# Altium PCB FMC-320U-B1.PcbDoc (part 2 of 2)
Units mil, origin at the board's own origin, x right, y up, seen from the top; angles counter-clockwise.
Board outline 3385.83 x 3385.83 mil, 2 copper layers (Top Layer, Bottom Layer), stack 65.8 mil thick; 83 components, 122 nets, 425 pads, 151 vias.
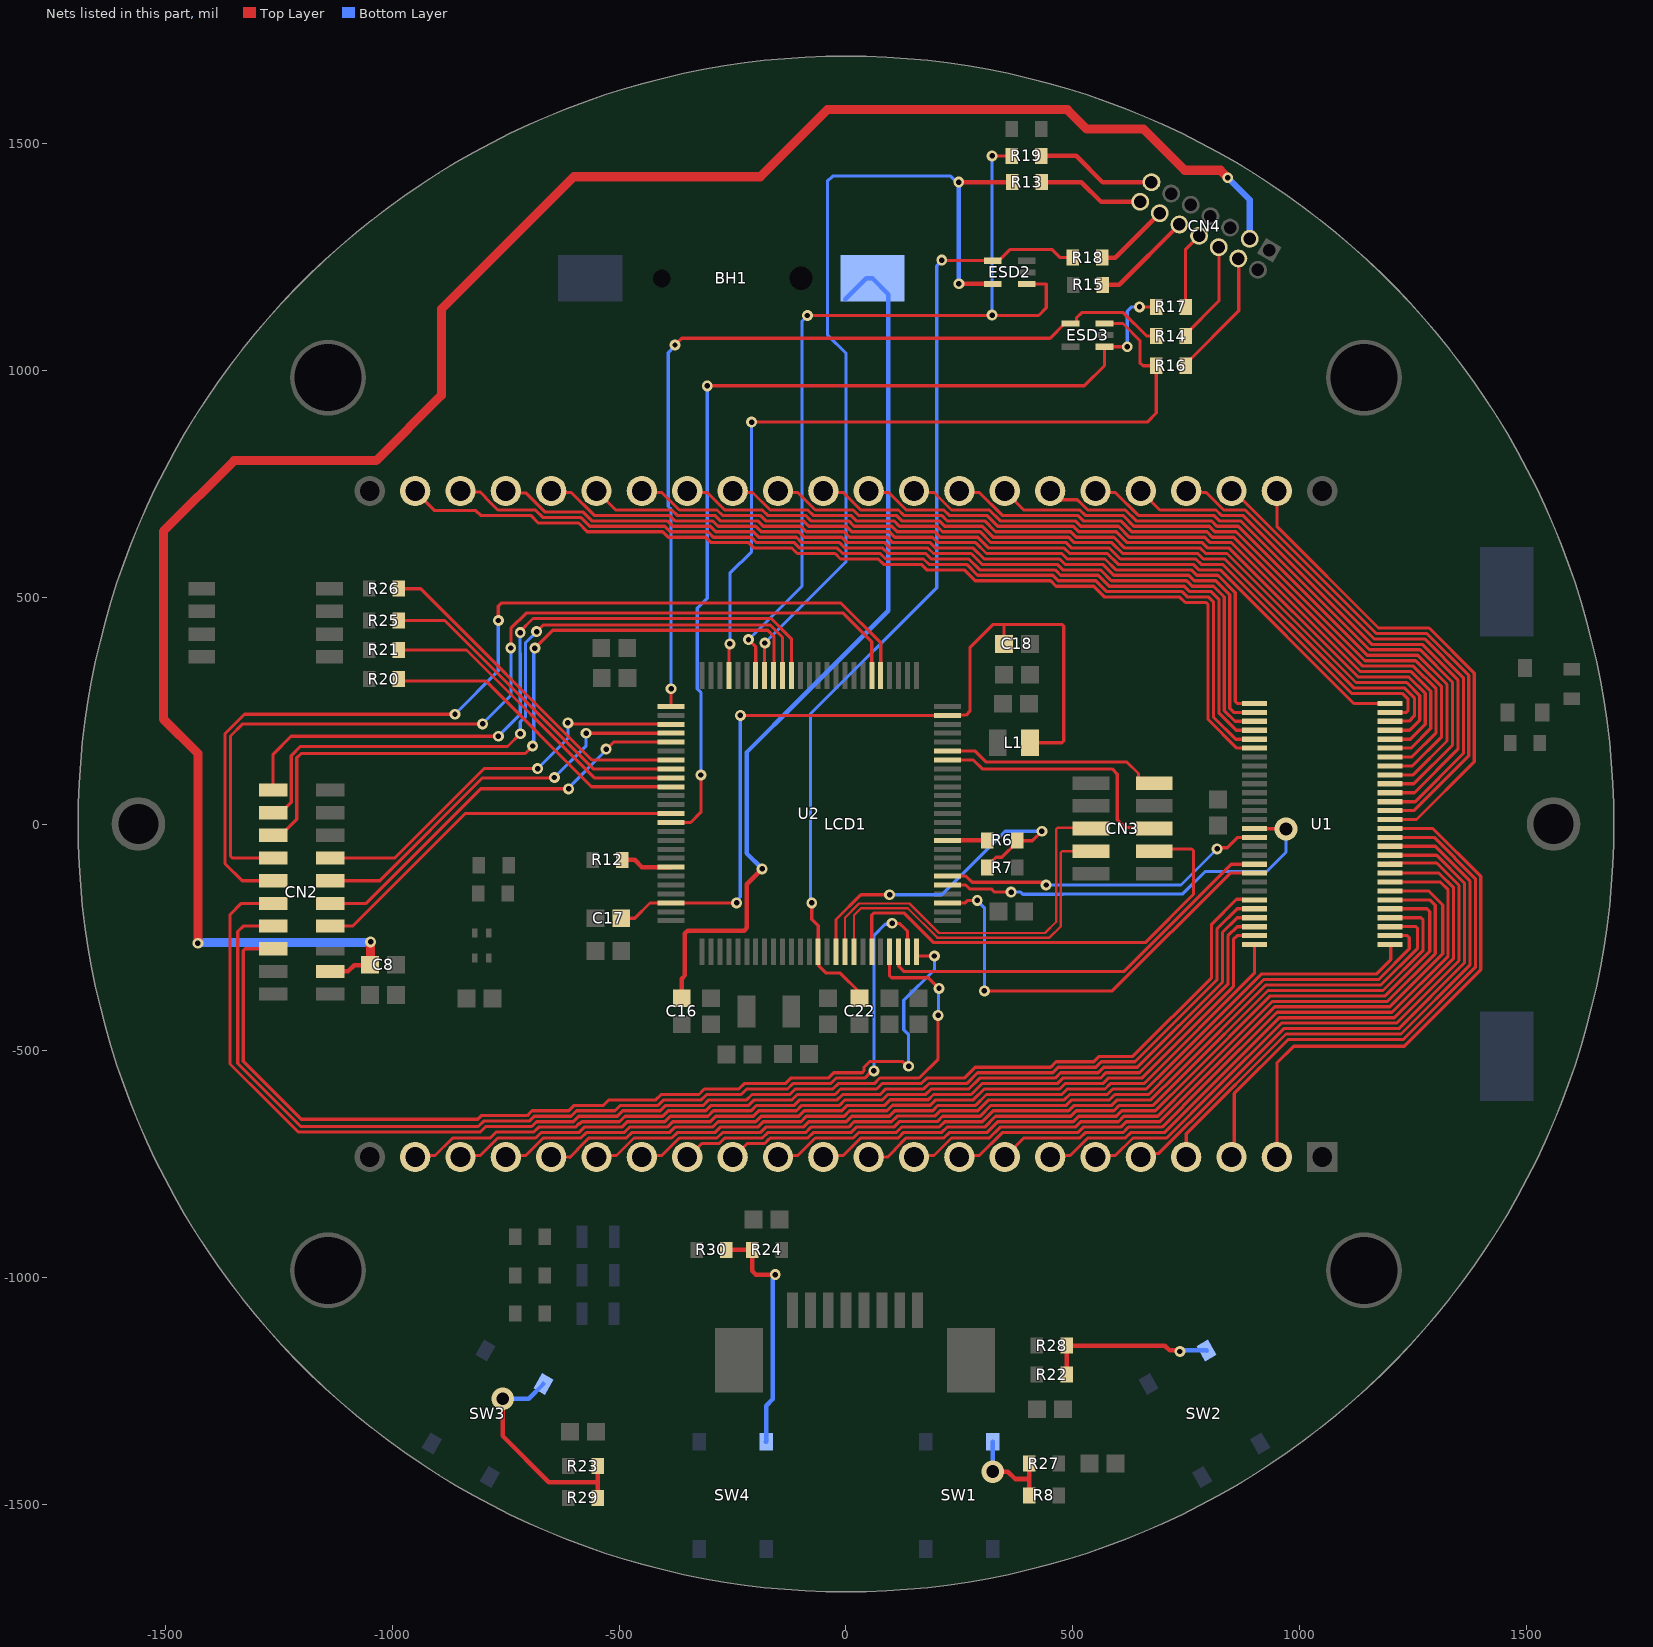
[diagram p2: the nets of this part, all layers, seen from the top]

## Via types
v1: diameter 24, hole 12, Top Layer to Bottom Layer, 140 vias
v2: diameter 50, hole 28, Top Layer to Bottom Layer, 11 vias

## Nets (pads, with @x,y where several pads share a name; then routed paths per layer and width w, separated by ;. In a path a pad name is that pad's centre, name@x,y a point inside that pad or via, vN(x,y) a via of type N, cw(c..) or ccw(c..) an arc to the next point about the centre after c; other vN are vias at no path point) (continued)
NetR6_1: R6.1 R7.2 U2.16 | length 761.9
  Top Layer w7: U2.16@-21.94,-281.65 -21.94,-210.64 32.73,-155.97 v1(96.17,-155.97) ; R7.2@311.88,-96 311.88,-92.06 330.78,-73.17 343.77,-73.17 377,-39.94 R6.1@377,-36 ; R6.1@379,-37 411,-37 v1(432,-16)
  Bottom Layer w7: v1(96.17,-155.97) 211.03,-155.97 351,-16 v1(432,-16)
NetR6_2: R6.2 U2.35 | length 89.4
  Top Layer w10: U2.35@223.65,-36.06 223.7,-36 R6.2@311.88,-36 R6.2@313,-36
NetR8_1: R8.1 R27.2 SW1.2 | length 222.6
  Top Layer w10: v2(323.82,-1427.72) 356.7,-1427.72 372.97,-1443.99 403.84,-1443.99 ; R8.1@403.84,-1480 403.84,-1478.28 403.84,-1443.99 ; R27.2@403.84,-1410 403.84,-1443.99
  Bottom Layer w10: v2(323.82,-1427.72) SW1.2@323.82,-1361.89
NetR12_2: R12.2 U2.94 | length 114.5
  Top Layer w10: R12.2@-493.44,-79 -466,-79 -449.89,-95.11 U2.94@-385.65,-95.11
NetR22_1: R22.1 R28.2 SW2.2 | length 379.2
  Top Layer w10: R22.1@486.18,-1214.06 R28.2@486.18,-1150 703,-1150 713.32,-1160.32 733.32,-1160.32 v1(736,-1163)
  Bottom Layer w10: v1(736,-1163) 738.33,-1160.67 794.74,-1160.67 SW2.2@794.87,-1160.8
NetR23_1: R23.1 R29.2 SW3.2 | length 507.3
  Top Layer w10: v2(-757,-1267) -757,-1349.14 -655.14,-1451 -547.44,-1451 ; R29.2@-547.44,-1485.71 -547.44,-1451 ; R23.1@-547.44,-1415.71 -547.44,-1451
  Bottom Layer w10: v2(-757,-1267) -699.39,-1267 SW3.2@-667.02,-1234.62
NetR24_1: R24.1 R30.2 SW4.2 | length 554.4
  Top Layer w10: R30.2@-264.44,-939 R24.1@-219.12,-939 ; v1(-155.94,-993.28) -198.84,-993.28 -207.12,-985 R24.1@-207.12,-951 ; R24.1@-219.12,-939 R24.1@-207.12,-939 R24.1@-207.12,-951 ; R24.1@-219.12,-939 -215.9,-939 -207.12,-947.78 R24.1@-207.12,-951
  Bottom Layer w10: SW4.2@-176.59,-1362.3 SW4.2@-176.18,-1361.89 -176.18,-1282.18 -162,-1268 -162,-1003.13 -155.94,-997.06 v1(-155.94,-993.28)
NetU1_15: U1.15 U2.30 | length 914.4
  Top Layer w7: U2.30@223.65,-134.48 263.67,-134.48 272.3,-143.11 320.12,-143.11 327.01,-150 v1(364,-150) ; U1.15@900.39,-9.84 900.97,-10.42 969.42,-10.42 v2(970,-11)
  Bottom Layer w7: v1(364,-150) 385.02,-150 390,-154.98 478.02,-154.98 479,-154 742.42,-154 791.42,-105 927,-105 970,-62 v2(970,-11)
NetU1_16: U1.16 U2.31 | length 728.4
  Top Layer w7: U2.31@223.65,-114.8 264.57,-114.8 278.26,-128.49 430.41,-128.49 436.4,-134.48 v1(441,-134.48) ; v1(818,-55.01) 820.55,-52.46 840.5,-52.46 863.43,-29.53 U1.16@900.39,-29.53
  Bottom Layer w7: v1(441,-134.48) 738.64,-134.48 790.34,-82.78 790.34,-82.67 v1(818,-55.01)
NetU1_19: U1.19 U2.23 | length 918.9
  Top Layer w7: U2.23@115.85,-281.65 116.36,-282.16 116.36,-313.97 127.22,-324.83 613.27,-324.83 849.52,-88.58 U1.19@900.39,-88.58
NetU1_20: U1.20 U2.28 | length 985.4
  Top Layer w7: U2.28@223.65,-173.85 263.25,-173.85 268.76,-168.34 v1(289.32,-168.34) ; v1@299.25,-362.07 v1(305.18,-368) 587.07,-368 846.8,-108.27 U1.20@900.39,-108.27
  Bottom Layer w7: v1(289.32,-168.34) 289.32,-168.43 305.18,-184.3 v1(305.18,-368)
NRST: C22.1 ESD2.4 R18.2 U2.14 | length 2104.7
  Top Layer w7: v1(-75.49,-173.85) -75.49,-209.95 -61.31,-224.12 U2.14@-61.31,-281.65 -60.8,-282.16 -60.8,-311.66 -43.83,-328.63 -12.75,-328.63 C22.1@30,-371.38 ; v1(211,1243) 211.71,1242.29 322.89,1242.29 ESD2.4@323.6,1241.59 336.39,1241.59 361.22,1266.42 454.62,1266.42 472.34,1248.7 R18.2@500.04,1248.7
  Bottom Layer w7: v1(-75.49,-173.85) -78.5,-170.84 -78.5,242.49 200,520.99 200,1230.4 211,1241.4 v1(211,1243)
PA0_RSVD: CN2.10 U2.22 | length 2454.4
  Top Layer w7: CN2.10@-1262.99,-175 -1333,-175 -1358,-200 -1358,-529 -1274,-613 -1208,-679 -806.04,-679 -794.04,-667 -693.01,-667 -682.29,-656.29 -601.26,-656.29 -589.26,-644.29 -504.23,-644.29 -492.23,-632.29 -409.2,-632.29 -397.2,-620.29 -314.18,-620.29 -302.18,-608.29 -219.15,-608.29 -207.15,-596.29 -124.12,-596.29 -112.12,-584.29 -29.09,-584.29 -17.09,-572.29 62.54,-572.29 74.83,-560 161.26,-560 203,-518.26 v1(202.96,-421.81) v1(202.96,-421.81) ; U2.22@96.17,-281.65 96.17,-334.9 100.27,-339 181,-339 204.25,-362.25 v1(205,-362.25)
  Bottom Layer w7: v1(202.96,-421.81) 203.98,-420.79 203.98,-363.27 v1(205,-362.25)
PA2_USART2_RSVD: CN2.8 U2.24 | length 2321.2
  Top Layer w7: CN2.8@-1262.99,-225 -1328.9,-225 -1340.9,-237 -1340.9,-528.07 -1201.97,-667 -811.01,-667 -799.01,-655 -697.98,-655 -687.26,-644.29 -606.23,-644.29 -594.23,-632.29 -509.2,-632.29 -497.2,-620.29 -414.18,-620.29 -402.18,-608.29 -319.15,-608.29 -307.15,-596.29 -231.18,-596.29 -219.18,-584.29 -129.09,-584.29 -117.09,-572.29 -34.06,-572.29 -22.06,-560.29 41.07,-560.29 57.02,-544.34 v1(61.5,-544.34) ; v1(101.68,-218.73) 102.51,-219.57 118.66,-219.57 130.59,-231.49 135.54,-236.44 U2.24@135.54,-281.65
  Bottom Layer w7: v1(61.5,-544.34) 62,-543.84 62,-244.97 86.05,-220.92 99.49,-220.92 v1(101.68,-218.73)
PA3_USART2_RSVD: CN2.6 U2.25 | length 2216.6
  Top Layer w7: CN2.6@-1262.99,-275 -1324.8,-275 -1328.9,-279.1 -1328.9,-523.1 -1201,-651 -811.98,-651 -803.98,-643 -702.95,-643 -692.24,-632.29 -611.2,-632.29 -599.2,-620.29 -534.56,-620.29 -522.56,-608.29 -419.15,-608.29 -407.15,-596.29 -324.12,-596.29 -312.12,-584.29 -236.15,-584.29 -224.15,-572.29 -134.06,-572.29 -122.06,-560.29 -39.03,-560.29 -27.03,-548.29 35.62,-548.29 39.72,-544.19 39.72,-535.85 51.73,-523.84 71.16,-523.84 71.21,-523.79 125.4,-523.79 135.61,-534 v1(138,-534) ; U2.25@155.22,-281.65 155.22,-288.99 157.23,-291 v1(195,-291)
  Bottom Layer w7: v1(138,-534) 138,-464.22 127.48,-453.7 127.48,-388.53 195,-321.01 v1(195,-291)
PB10-RSVD: CN3.5 U2.44 | length 577.9
  Top Layer w7: U2.44@223.65,141.11 280.45,141.11 300.13,121.43 586.57,121.43 598,110 598,9.38 615.38,-8 CN3.5@680.88,-8
PB11-RSVD: CN3.9 U2.45 | length 491.5
  Top Layer w7: U2.45@223.65,160.8 284.94,160.8 309.18,136.55 619.61,136.55 644.94,111.22 644.94,101.46 654.4,92 CN3.9@680.88,92
PC2_AN_RSVD: CN3.6 U2.17 | length 874.4
  Top Layer w5: U2.17@-2.26,-281.65 -2.26,-206.51 28.78,-175.47 140.24,-175.47 205.28,-240.5 438.68,-240.5 463.43,-215.76 463.43,-10.93 466.36,-8 538.12,-8 CN3.6@540.12,-10
PC3_AN_RSVD: CN3.4 U2.18 | length 811
  Top Layer w5: U2.18@17.43,-281.65 17.43,-200.97 32.93,-185.47 136.1,-185.47 201.14,-250.5 448.68,-250.5 473.43,-225.76 473.43,-62.93 476.36,-60 CN3.4@540.12,-60
PC9_RSRVD: CN2.18 U2.66 | length 1560.8
  Top Layer w7: CN2.18@-1262.99,25 -1246.06,25 -1223,48.07 -1223,93.95 -1223,150.87 -1203.02,170.85 -746.15,170.85 v1(-718,199) ; v1(-682,424) -667,439 -167.54,439 -140.06,411.52 U2.66@-140.06,327.65
  Bottom Layer w7: v1(-718,199) -718,225.02 -706.25,236.77 -706.25,381.78 -706.5,382.02 -706.5,399.5 v1(-682,424)
PC10_SPI3_RSVD: CN2.13 U2.78 | length 896
  Top Layer w7: CN2.13@-1137.01,-75 -995,-75 -797.76,122.24 v1(-679.86,122.24) ; v1(-613,223) -610.67,220.67 -386.46,220.67 U2.78@-385.65,219.85
  Bottom Layer w7: v1(-679.86,122.24) -613,189.1 v1(-613,223)
PC11_SPI3_RSVD: CN2.11 U2.79 | length 902.2
  Top Layer w7: CN2.11@-1137.01,-125 -1028.03,-125 -801.29,101.74 -643.82,101.74 v1(-643,102.56) ; v1(-572.99,200.17) U2.79@-385.65,200.17
  Bottom Layer w7: v1(-643,102.56) -572.99,172.57 v1(-572.99,200.17)
PC12_SPI3_RSVD: CN2.9 U2.80 | length 901.5
  Top Layer w7: CN2.9@-1137.01,-175 -1058,-175 -805.46,77.54 v1(-611.53,77.54) ; v1(-529,165) -528.14,165 -512.66,180.48 U2.80@-385.65,180.48
  Bottom Layer w7: v1(-611.53,77.54) -611.53,80 -529,162.53 v1(-529,165)
PD1: R26.2 U2.82 | length 770.8
  Top Layer w7: R26.2@-986.29,518.74 -937.73,518.74 -560.1,141.11 -373.51,141.11 U2.82@-372.4,140
PD2: R25.2 U2.83 | length 736.2
  Top Layer w7: R25.2@-986.29,448.64 -884.6,448.64 -557.39,121.43 U2.83@-385.65,121.43
PD3: R21.2 U2.84 | length 716.3
  Top Layer w7: R21.2@-986.29,383.7 -836.63,383.7 -554.67,101.74 U2.84@-386.74,101.74
PD4: R20.2 U2.85 | length 699
  Top Layer w7: R20.2@-986.29,319.53 -982.36,315.59 -794.58,315.59 -561.05,82.06 U2.85@-385.65,82.06
PD7_RSVD: CN2.7 U2.88 | length 854.1
  Top Layer w7: CN2.7@-1137.01,-225 -1088,-225 -840,23 U2.88@-385.65,23
RADIO_ENABLE: CN2.16 U2.67 | length 1586.5
  Top Layer w7: CN2.16@-1262.99,-25 -1246.06,-25 -1211,10.07 -1211,98.92 -1211,145.9 -1201.4,155.5 -707.5,155.5 v1(-691,172) ; v1(-686,387.85) -646.85,427 -172.51,427 -158.5,412.99 -158.5,328.89 U2.67@-159.74,327.65
  Bottom Layer w7: v1(-691,172) -688.5,174.5 -688.5,385.35 v1(-686,387.85)
RADIO_PWR_ON: CN2.20 U2.65 | length 1552.3
  Top Layer w7: CN2.20@-1262.99,75 -1262.99,154.01 -1223.52,193.48 v1(-766.51,193.48) ; v1(-718.25,422) -718.25,424.75 -690,453 -164.57,453 -120.37,408.8 U2.65@-120.37,327.65
  Bottom Layer w7: v1(-766.51,193.48) -718.25,241.74 -718.25,376.81 -718.5,377.05 -718.5,421.75 v1(-718.25,422)
RADIO_UART_RX: CN2.12 U2.55 | length 2164.5
  Top Layer w7: CN2.12@-1262.99,-125 -1331.2,-125 -1369,-87.2 -1369,198.97 -1325.97,242 v1(-862,242) ; v1(-766.51,448.64) -766.51,480.49 -760,487 -11.06,487 76.48,399.46 U2.55@76.48,327.65
  Bottom Layer w7: v1(-862,242) -766.51,337.49 v1(-766.51,448.64)
RADIO_UART_TX: CN2.14 U2.56 | length 2074.1
  Top Layer w7: CN2.14@-1262.99,-75 -1352.9,-75 -1357,-70.9 -1357,194 -1330.33,220.67 v1(-801.29,220.67) ; v1(-739,388) -738.75,388.25 -738.75,431.28 -705.03,465 -6.03,465 56.8,402.17 U2.56@56.8,327.65
  Bottom Layer w7: v1(-801.29,220.67) -738.75,283.2 -738.75,387.75 v1(-739,388)
SEG0: LCD1.21 U1.23 | length 2160
  Top Layer w7: LCD1.21@-950,-734.25 -946.69,-730.94 -906.04,-730.94 -867.38,-692.29 -784.35,-692.29 -771.07,-679 -688.04,-679 -677.32,-668.29 -596.29,-668.29 -589,-661 -587.01,-661 -582.29,-656.29 -499.26,-656.29 -487.26,-644.29 -404.23,-644.29 -392.23,-632.29 -309.21,-632.29 -297.21,-620.29 -214.18,-620.29 -202.18,-608.29 -119.15,-608.29 -107.15,-596.29 -24.12,-596.29 -12.12,-584.29 67.51,-584.29 79.8,-572 166.23,-572 177.94,-560.29 260.97,-560.29 284.97,-536.29 451.03,-536.29 463.03,-524.29 546.06,-524.29 558.06,-512.29 632.24,-512.29 806,-338.53 806,-221 861,-166 874.02,-166 874.42,-166.4 U1.23@905.6,-166.4
SEG1: LCD1.20 U1.24 | length 2041.4
  Top Layer w7: LCD1.20@-850,-734.25 -846.69,-730.94 -806.04,-730.94 -767.38,-692.29 -684.35,-692.29 -672.35,-680.29 -589.32,-680.29 -577.32,-668.29 -494.29,-668.29 -482.29,-656.29 -399.26,-656.29 -387.26,-644.29 -304.24,-644.29 -292.23,-632.29 -209.21,-632.29 -197.21,-620.29 -114.18,-620.29 -102.18,-608.29 -19.15,-608.29 -7.15,-596.29 75.43,-596.29 87.72,-584 171.2,-584 182.91,-572.29 265.94,-572.29 289.94,-548.29 456,-548.29 468,-536.29 551.03,-536.29 563.03,-524.29 637.21,-524.29 818,-343.5 818,-231.34 862.33,-187.01 U1.24@898.99,-187.01
SEG2: LCD1.19 U1.25 | length 1924.9
  Top Layer w7: LCD1.19@-750,-734.25 -746.69,-730.94 -706.04,-730.94 -667.38,-692.29 -584.35,-692.29 -572.35,-680.29 -489.32,-680.29 -477.32,-668.29 -394.29,-668.29 -382.29,-656.29 -299.26,-656.29 -287.26,-644.29 -204.23,-644.29 -192.23,-632.29 -109.21,-632.29 -97.21,-620.29 -14.18,-620.29 -2.18,-608.29 80.4,-608.29 92.69,-596 176.17,-596 187.88,-584.29 270.91,-584.29 294.91,-560.29 460.97,-560.29 472.97,-548.29 556,-548.29 568,-536.29 642.18,-536.29 830,-348.47 830,-239.03 862.33,-206.69 U1.25@892.31,-206.69
SEG3: LCD1.18 U1.26 | length 1824.3
  Top Layer w7: LCD1.18@-650,-734.25 -608.75,-734.25 -608.4,-734.6 -591.96,-718.17 -591.96,-716.87 -567.38,-692.29 -484.35,-692.29 -472.35,-680.29 -389.32,-680.29 -377.32,-668.29 -294.29,-668.29 -282.29,-656.29 -199.26,-656.29 -187.26,-644.29 -104.23,-644.29 -92.23,-632.29 -9.21,-632.29 2.79,-620.29 85.37,-620.29 97.66,-608 181.14,-608 192.85,-596.29 275.88,-596.29 299.88,-572.29 465.94,-572.29 477.94,-560.29 560.97,-560.29 572.97,-548.29 647.16,-548.29 842,-353.44 842,-246.71 862.33,-226.38 U1.26@900.39,-226.38
SEG4: LCD1.17 U1.27 | length 1713.5
  Top Layer w7: LCD1.17@-550,-734.25 -546.69,-730.94 -506.04,-730.94 -467.38,-692.29 -384.35,-692.29 -372.35,-680.29 -289.32,-680.29 -277.32,-668.29 -194.29,-668.29 -182.29,-656.29 -99.26,-656.29 -87.26,-644.29 -4.23,-644.29 7.77,-632.29 90.34,-632.29 102.63,-620 186.11,-620 197.82,-608.29 280.85,-608.29 304.85,-584.29 470.91,-584.29 482.91,-572.29 565.94,-572.29 577.94,-560.29 652.13,-560.29 854,-358.41 854,-254.4 862.33,-246.06 U1.27@900.39,-246.06
SEG5: LCD1.16 U1.28 | length 1581.5
  Top Layer w7: LCD1.16@-450,-734.25 -446.69,-730.94 -406.04,-730.94 -367.38,-692.29 -284.35,-692.29 -272.35,-680.29 -189.32,-680.29 -177.32,-668.29 -94.29,-668.29 -82.29,-656.29 0.74,-656.29 12.74,-644.29 95.31,-644.29 107.6,-632 191.08,-632 202.79,-620.29 285.82,-620.29 309.82,-596.29 475.88,-596.29 487.88,-584.29 570.91,-584.29 582.91,-572.29 657.1,-572.29 900.39,-328.99 U1.28@900.39,-265.75
SEG6: LCD1.15 U1.29 | length 1765.3
  Top Layer w7: LCD1.15@-350,-734.25 -347.75,-734.25 -317.79,-704.29 -279.38,-704.29 -267.38,-692.29 -232.62,-692.29 -184.35,-692.29 -172.35,-680.29 -89.32,-680.29 -77.32,-668.29 5.71,-668.29 17.71,-656.29 100.28,-656.29 112.57,-644 196.05,-644 207.77,-632.29 290.79,-632.29 314.79,-608.29 480.85,-608.29 492.85,-596.29 575.88,-596.29 587.88,-584.29 662.07,-584.29 706,-540.35 915.35,-331 1169,-331 1201,-299 U1.29@1201,-265
SEG7: LCD1.14 U1.30 | length 1739.4
  Top Layer w7: LCD1.14@-250,-734.25 -247.75,-734.25 -217.79,-704.29 -179.38,-704.29 -171.48,-696.39 -167.38,-692.29 -84.35,-692.29 -72.35,-680.29 10.68,-680.29 22.68,-668.29 105.25,-668.29 117.54,-656 201.02,-656 212.74,-644.29 295.77,-644.29 319.77,-620.29 485.82,-620.29 497.82,-608.29 580.85,-608.29 592.85,-596.29 667.04,-596.29 718,-545.32 920.32,-343 1173.97,-343 1241.77,-275.2 1241.77,-250.16 1237.67,-246.06 U1.30@1211.06,-246.06
SEG8: LCD1.13 U1.31 | length 1709.4
  Top Layer w7: LCD1.13@-150,-734.25 -146.69,-730.94 -106.04,-730.94 -67.38,-692.29 15.65,-692.29 27.65,-680.29 110.22,-680.29 122.51,-668 205.99,-668 217.71,-656.29 300.74,-656.29 324.74,-632.29 490.79,-632.29 502.79,-620.29 585.82,-620.29 597.82,-608.29 672.01,-608.29 730,-550.3 925.3,-355 1178.94,-355 1260.24,-273.7 1260.24,-230.34 1255.9,-226 U1.31@1197,-226
SEG9: LCD1.12 U1.32 | length 1652.8
  Top Layer w7: LCD1.12@-50,-734.25 -46.69,-730.94 -6.04,-730.94 32.62,-692.29 115.19,-692.29 127.48,-680 210.96,-680 222.68,-668.29 305.71,-668.29 329.71,-644.29 495.77,-644.29 507.77,-632.29 590.79,-632.29 602.79,-620.29 676.98,-620.29 742,-555.27 930.27,-367 1183.91,-367 1272.24,-278.67 1272.24,-211.34 1267.59,-206.69 U1.32@1199.69,-206.69
SEG10: LCD1.11 U1.33 | length 1603.4
  Top Layer w7: LCD1.11@50,-734.25 92.25,-734.25 108.04,-718.47 108.04,-716.87 132.91,-692 215.93,-692 227.65,-680.29 310.68,-680.29 334.68,-656.29 500.74,-656.29 512.74,-644.29 595.77,-644.29 607.77,-632.29 681.95,-632.29 754,-560.24 935.24,-379 1188.88,-379 1287,-280.88 1287,-193.11 1280.9,-187.01 U1.33@1199.61,-187.01
SEG11: LCD1.10 U1.34 | length 1545.8
  Top Layer w7: LCD1.10@150,-734.25 153.31,-730.94 193.96,-730.94 232.62,-692.29 315.65,-692.29 339.65,-668.29 505.71,-668.29 517.71,-656.29 600.74,-656.29 612.74,-644.29 686.92,-644.29 766,-565.21 940.21,-391 1193.85,-391 1299,-285.85 1299,-179 1287.32,-167.32 U1.34@1199.61,-167.32
SEG12: LCD1.9 U1.35 | length 1487.5
  Top Layer w7: LCD1.9@250,-734.25 253.31,-730.94 293.96,-730.94 344.62,-680.29 510.68,-680.29 522.68,-668.29 605.71,-668.29 617.71,-656.29 691.89,-656.29 778,-570.18 945.18,-403 1198.82,-403 1315.5,-286.32 1315.5,-178.53 1284.61,-147.64 U1.35@1199.61,-147.64
SEG13: LCD1.8 U1.36 | length 1434.7
  Top Layer w7: LCD1.8@350,-734.25 391.96,-692.29 515.65,-692.29 527.65,-680.29 610.68,-680.29 622.68,-668.29 696.86,-668.29 790,-575.15 950.15,-415 1203.79,-415 1327.5,-291.29 1327.5,-145.32 1310.13,-127.95 U1.36@1206.95,-127.95
SEG14: LCD1.7 U1.37 | length 1376.9
  Top Layer w7: LCD1.7@450,-734.25 453.31,-730.94 493.96,-730.94 532.62,-692.29 615.65,-692.29 627.65,-680.29 701.83,-680.29 802,-580.12 955.12,-427 1208.76,-427 1339.5,-296.26 1339.5,-140.35 1307.42,-108.27 U1.37@1202.72,-108.27
SEG15: LCD1.6 U1.38 | length 1321.7
  Top Layer w7: LCD1.6@550,-734.25 553.31,-730.94 593.96,-730.94 632.62,-692.29 706.8,-692.29 814,-585.09 960.09,-439 1213.73,-439 1351.5,-301.23 1351.5,-135.38 1302.12,-86 U1.38@1197,-86
SEG16: LCD1.5 U1.39 | length 1253.5
  Top Layer w7: LCD1.5@650,-734.25 658.06,-726.2 689.86,-726.2 826,-590.06 965.06,-451 1218.71,-451 1363.5,-306.2 1363.5,-130.41 1302.09,-69 U1.39@1202,-69
SEG17: LCD1.4 U1.40 | length 1218.3
  Top Layer w7: LCD1.4@750,-734.25 750,-683.03 970.03,-463 1223.68,-463 1375.5,-311.18 1375.5,-125.44 1299.27,-49.21 U1.40@1205.21,-49.21
SEG18: LCD1.3 U1.41 | length 1205.6
  Top Layer w7: LCD1.3@850,-734.25 856,-728.25 856,-594 975,-475 1228.65,-475 1387.5,-316.15 1387.5,-120.47 1296.56,-29.53 U1.41@1204.53,-29.53
SEG19: LCD1.2 U1.42 | length 1192
  Top Layer w7: LCD1.2@943,-732 950,-725 950,-527 987.1,-489.9 1230.72,-489.9 1399.5,-321.12 1399.5,-115.5 1293.84,-9.84 U1.42@1199.61,-9.84
SEG20: LCD1.43 U1.43 | length 1080.9
  Top Layer w7: LCD1.43@950,734.25 950,656 1174,432 1285.65,432 1385,332.65 1385,137 1257.84,9.84 U1.43@1199.61,9.84
SEG21: LCD1.42 U1.44 | length 1092.6
  Top Layer w7: LCD1.42@849,733 856.03,733 1169.03,420 1280.68,420 1373,327.68 1373,150.46 1252.07,29.53 U1.44@1199.61,29.53
SEG22: LCD1.41 U1.45 | length 1150
  Top Layer w7: LCD1.41@754,734 757.06,730.94 793.96,730.94 832.62,692.29 879.77,692.29 1164.06,408 1275.71,408 1361,322.71 1361,155.43 1254.79,49.21 U1.45@1199.61,49.21
SEG23: LCD1.40 U1.46 | length 1214.8
  Top Layer w7: LCD1.40@654,737 654,730.25 691.96,692.29 815.65,692.29 827.65,680.29 874.8,680.29 1159.09,396 1270.73,396 1349,317.73 1349,164.64 1253.26,68.9 U1.46@1199.61,68.9
SEG24: LCD1.39 U1.47 | length 1272.2
  Top Layer w7: LCD1.39@551.22,734.78 555.06,730.94 593.96,730.94 644.62,680.29 810.68,680.29 822.68,668.29 869.83,668.29 1154.12,384 1265.76,384 1337,312.76 1337,173.85 1251.73,88.58 U1.47@1199.61,88.58
SEG25: LCD1.38 U1.48 | length 1312.7
  Top Layer w7: LCD1.38@471,715 509.91,715 520.62,704.29 532.62,692.29 615.65,692.29 639.65,668.29 805.71,668.29 817.71,656.29 864.86,656.29 1149.15,372 1260.79,372 1325,307.79 1325,183.07 1250.2,108.27 U1.48@1199.61,108.27
  Top Layer w10: LCD1.38@450,734.25 449.25,735 449,735 453,731 LCD1.38@455,731
SEG26: LCD1.37 U1.49 | length 1391.9
  Top Layer w7: LCD1.37@349.06,730.94 353.31,730.94 391.96,692.29 515.65,692.29 527.65,680.29 610.68,680.29 634.68,656.29 800.74,656.29 812.74,644.29 859.89,644.29 1144.18,360 1255.82,360 1313,302.82 1313,192.28 1248.67,127.95 U1.49@1199.61,127.95
SEG27: LCD1.36 U1.50 | length 1451.8
  Top Layer w7: LCD1.36@250,734.25 253.31,730.94 293.96,730.94 344.62,680.29 510.68,680.29 522.68,668.29 605.71,668.29 629.71,644.29 795.77,644.29 807.77,632.29 854.92,632.29 1139.21,348 1250.85,348 1301,297.85 1301,201.49 1247.15,147.64 U1.50@1199.61,147.64
SEG28: LCD1.35 U1.51 | length 1503.8
  Top Layer w7: LCD1.35@157,729 158.94,730.94 193.96,730.94 232.62,692.29 315.65,692.29 339.65,668.29 505.71,668.29 517.71,656.29 600.74,656.29 624.74,632.29 790.79,632.29 802.79,620.29 849.95,620.29 1134.24,336 1245.88,336 1289,292.88 1289,210.71 1245.62,167.32 U1.51@1199.61,167.32
SEG29: LCD1.34 U1.52 | length 1569.5
  Top Layer w7: LCD1.34@51,733.25 53.31,730.94 93.96,730.94 132.62,692.29 215.65,692.29 227.65,680.29 310.68,680.29 334.68,656.29 500.74,656.29 512.74,644.29 595.77,644.29 619.77,620.29 785.82,620.29 797.82,608.29 844.98,608.29 1129.27,324 1240.91,324 1277,287.91 1277,219.92 1244.09,187.01 U1.52@1199.61,187.01
SEG30: LCD1.33 U1.53 | length 1633.2
  Top Layer w7: LCD1.33@-52,736 -46.94,730.94 -6.04,730.94 32.62,692.29 115.65,692.29 127.65,680.29 210.68,680.29 222.68,668.29 305.71,668.29 329.71,644.29 495.77,644.29 507.77,632.29 590.79,632.29 614.79,608.29 780.85,608.29 792.85,596.29 840.01,596.29 1124.3,312 1235.94,312 1265,282.94 1265,229.13 1242.56,206.69 U1.53@1199.61,206.69
SEG31: LCD1.32 U1.54 | length 1687.1
  Top Layer w7: LCD1.32@-146,725 -140.06,730.94 -106.04,730.94 -67.38,692.29 15.65,692.29 27.65,680.29 110.68,680.29 122.68,668.29 205.71,668.29 217.71,656.29 300.74,656.29 324.74,632.29 490.79,632.29 502.79,620.29 585.82,620.29 609.82,596.29 775.88,596.29 787.88,584.29 835.04,584.29 1119.32,300 1230.97,300 1253,277.97 1253,238.35 1241.38,226.72 1199.95,226.72 U1.54@1199.61,226.38
SEG32: LCD1.31 U1.55 | length 1745.4
  Top Layer w7: LCD1.31@-250,734.25 -246.69,730.94 -206.04,730.94 -167.38,692.29 -84.35,692.29 -72.35,680.29 10.68,680.29 22.68,668.29 105.71,668.29 117.71,656.29 200.74,656.29 212.74,644.29 295.77,644.29 319.77,620.29 485.82,620.29 497.82,608.29 580.85,608.29 604.85,584.29 770.91,584.29 782.91,572.29 830.07,572.29 1114.35,288 1226,288 1239.16,274.84 1239.16,250.16 1235.06,246.06 U1.55@1199.61,246.06
SEG33: LCD1.30 U1.56 | length 1737.4
  Top Layer w7: LCD1.30@-345.06,730.94 -306.04,730.94 -267.38,692.29 -184.35,692.29 -172.35,680.29 -89.32,680.29 -77.32,668.29 5.71,668.29 17.71,656.29 100.74,656.29 112.74,644.29 195.77,644.29 207.77,632.29 290.79,632.29 314.79,608.29 480.85,608.29 492.85,596.29 575.88,596.29 599.88,572.29 765.94,572.29 777.94,560.29 825.1,560.29 1119.64,265.75 U1.56@1199.61,265.75
SEG34: LCD1.29 U1.1 | length 1684.6
  Top Layer w7: LCD1.29@-450,733 -447.94,730.94 -406.04,730.94 -367.38,692.29 -284.35,692.29 -272.35,680.29 -189.32,680.29 -177.32,668.29 -94.29,668.29 -82.29,656.29 0.74,656.29 12.74,644.29 95.77,644.29 107.77,632.29 190.79,632.29 202.79,620.29 285.82,620.29 309.82,596.29 475.88,596.29 487.88,584.29 570.91,584.29 594.91,560.29 760.97,560.29 772.97,548.29 820.13,548.29 858.23,510.18 858.23,270 862.33,265.9 900.24,265.9 U1.1@900.39,265.75
SEG35: LCD1.28 U1.2 | length 1798.6
  Top Layer w7: LCD1.28@-544,736 -544,728.25 -508.04,692.29 -384.35,692.29 -372.35,680.29 -289.32,680.29 -277.32,668.29 -194.29,668.29 -182.29,656.29 -99.26,656.29 -87.26,644.29 -4.23,644.29 7.77,632.29 90.79,632.29 102.79,620.29 185.82,620.29 197.82,608.29 280.85,608.29 304.85,584.29 470.91,584.29 482.91,572.29 565.94,572.29 589.94,548.29 756,548.29 768,536.29 815.16,536.29 846,505.44 846,255 854.94,246.06 U1.2@900.39,246.06
SEG36: LCD1.27 U1.3 | length 1906.5
  Top Layer w7: LCD1.27@-650,732 -648.94,730.94 -606.04,730.94 -555.38,680.29 -389.32,680.29 -377.32,668.29 -294.29,668.29 -282.29,656.29 -199.26,656.29 -187.26,644.29 -104.23,644.29 -92.23,632.29 -9.21,632.29 2.79,620.29 85.82,620.29 97.82,608.29 180.85,608.29 192.85,596.29 275.88,596.29 299.88,572.29 465.94,572.29 477.94,560.29 560.97,560.29 584.97,536.29 751.03,536.29 763.03,524.29 810.18,524.29 834,500.47 834,250.03 857.65,226.38 U1.3@900.39,226.38
SEG37: LCD1.26 U1.4 | length 2013.8
  Top Layer w7: LCD1.26@-747,737 -740.04,730.04 -706.04,730.04 -664,688 -580.07,688 -560.35,668.29 -394.29,668.29 -382.29,656.29 -299.26,656.29 -287.26,644.29 -204.23,644.29 -192.23,632.29 -109.21,632.29 -97.21,620.29 -14.18,620.29 -2.18,608.29 80.85,608.29 92.85,596.29 175.88,596.29 187.88,584.29 270.91,584.29 294.91,560.29 460.97,560.29 472.97,548.29 556,548.29 580,524.29 746.06,524.29 758.06,512.29 805.21,512.29 822,495.5 822,245 860.31,206.69 U1.4@900.39,206.69
SEG38: LCD1.25 U1.5 | length 2123.1
  Top Layer w7: LCD1.25@-846,728 -842.07,731.93 -806.04,731.93 -795,720.9 -795,719.91 -767.38,692.29 -685.26,692.29 -668.97,676 -585.04,676 -565.32,656.29 -399.26,656.29 -387.26,644.29 -304.23,644.29 -292.23,632.29 -209.21,632.29 -197.21,620.29 -114.18,620.29 -102.18,608.29 -19.15,608.29 -7.15,596.29 75.88,596.29 87.88,584.29 170.91,584.29 182.91,572.29 265.94,572.29 289.94,548.29 456,548.29 468,536.29 551.03,536.29 575.03,512.29 741.09,512.29 753.09,500.29 799.71,500.29 810,490 810,235.97 858.96,187.01 U1.5@900.39,187.01
SEG39: LCD1.24 U1.6 | length 2233.5
  Top Layer w7: LCD1.24@-950,734.25 -906.75,691 -816.12,691 -805.41,680.29 -695.29,680.29 -678.54,663.54 -589.55,663.54 -570.29,644.29 -404.23,644.29 -392.23,632.29 -309.21,632.29 -297.21,620.29 -214.18,620.29 -202.18,608.29 -119.15,608.29 -107.15,596.29 -24.12,596.29 -12.12,584.29 70.91,584.29 82.91,572.29 165.94,572.29 177.94,560.29 260.97,560.29 284.97,536.29 451.03,536.29 463.03,524.29 546.06,524.29 570.06,500.29 736.12,500.29 748.12,488.29 793.9,488.29 798,484.19 798,231 861.68,167.32 U1.6@900.39,167.32
SWCLK: ESD3.4 R14.2 U2.76 | length 1913.1
  Top Layer w7: U2.76@-385.65,259.22 v1(-385.65,298.12) ; v1(-377,1056) -362,1071 450.02,1071 482.4,1103.38 ESD3.4@495.2,1103.38 ; ESD3.4@505.1,1103.38 508.49,1106.77 508.49,1116.67 519.36,1127.54 611.36,1127.54 663.08,1075.82 R14.2@683.52,1075.82
  Bottom Layer w7: v1(-385.65,298.12) -385.65,693.58 -391.96,699.9 -391.96,1039.14 -377,1054.11 v1(-377,1056)
SWDIO: ESD3.3 R16.2 U2.72 | length 1764.6
  Top Layer w7: U2.72@-258.17,327.65 -258.17,394.83 v1(-256,397) ; v1(-208.04,886) 664,886 684,906 684,1009.72 R16.2@683.52,1010.2 654.87,1010.2 648,1017.06 648,1066 610.62,1103.38 ESD3.3@570,1103.38
  Bottom Layer w7: v1(-256,397) -256,552.64 -208.04,600.6 v1(-208.04,886)
SWO: ESD3.1 R17.2 U2.89 | length 2159.1
  Top Layer w7: U2.89@-385.65,3.32 -342.68,3.32 -320,26 v1(-320,108) ; v1(-306,966) 525.41,966 570,1010.59 ESD3.1@570,1052.2 v1(620,1052.2) ; v1(647,1140) 683.33,1140 R17.2@683.52,1140.2
  Bottom Layer w7: v1(-320,108) -320,290.2 -328,298.2 -328,475.8 -306,497.8 v1(-306,966) ; v1(620,1052.2) 620,1130 630,1140 v1(647,1140)
T_JTDI: CN4.10 R15.1 | length 224
  Top Layer w10: R15.1@566.16,1188.7 602.1,1188.7 CN4.10@735.1,1321.7
T_NRST: CN4.12 R18.1 | length 167.2
  Top Layer w10: R18.1@565.16,1248.7 593.8,1248.7 CN4.12@691.8,1346.7
T_SWCLK: CN4.6 R14.1 | length 226.6
  Top Layer w7: R14.1@748.64,1075.82 748.64,1079.75 822,1153.11 CN4.6@822,1272
T_SWDIO: CN4.4 R16.1 | length 284.4
  Top Layer w7: R16.1@748.64,1010.2 748.64,1014.13 866,1131.49 CN4.4@866,1246
T_SWO: CN4.8 R17.1 | length 164.1
  Top Layer w7: R17.1@748.64,1140.2 748.64,1266.94 771,1289.3 CN4.8@771,1295
T_VCP_RX: CN4.13 R19.1 | length 264.2
  Top Layer w10: R19.1@433.31,1473 507.65,1473 565.65,1415 CN4.13@673.49,1415
T_VCP_TX: CN4.14 R13.1 | length 227.6
  Top Layer w10: R13.1@438.87,1415 518.92,1415 562.22,1371.7 CN4.14@648.49,1371.7
USART1_RX: ESD2.1 R19.2 U2.69 | length 1877.3
  Top Layer w7: v1(-215,406.5) -199.11,390.57 U2.69@-199.11,327.65 ; v1(-85,1121) 424.58,1121 441.58,1138 441.58,1190.41 ESD2.1@398.4,1190.41 ; v1(322,1473) R19.2@365.32,1473
  Bottom Layer w7: v1(-215,406.5) -97,524.5 -97,1108.4 -85,1120.4 v1(-85,1121) ; v1(322,1122) v1(322,1473)
USART1_TX: ESD2.5 R13.2 U2.68 | length 1897
  Top Layer w7: U2.68@-179.43,327.65 -179.43,398.57 v1(-179,399)
  Top Layer w10: v1(248.66,1415) R13.2@366.22,1415 ; v1(249,1191) 249.3,1190.7 323.3,1190.7 ESD2.5@323.6,1190.41
  Bottom Layer w7: v1(-179,399) 0,578 0,1038 -41,1079 -41,1416.9 -29.58,1428.32 230.74,1428.32 244.06,1415 v1(248.66,1415)
  Bottom Layer w10: v1(248.66,1415) 248.83,1414.83 248.83,1191.17 v1(249,1191)
VBAT: BH1.POS C16.1 | length 1971.1
  Top Layer w10: C16.1@-362,-384.25 -362,-340.86 -355,-333.86 -355,-240.86 -349.14,-235 -224.65,-235 -218.8,-229.14 -218.8,-132.8 v1(-185,-99)
  Bottom Layer w10: v1(-185,-99) -219.21,-64.79 -219.21,157.79 -99.5,277.5 93.46,470.46 93.46,1168.01 BH1.POS@58.48,1203 44.34,1203 BH1.POS@-1.85,1156.82
VDD: C8.1 CN2.3 CN4.3 | length 4526.7
  Top Layer w10: CN2.3@-1137.01,-325 -1097.88,-325 -1084,-311.12 C8.1@-1049.95,-311.12
  Top Layer w14: C8.1@-1049.95,-311.12 C8.1@-1049.26,-310.43 C8.1@-1048.63,-309.8 ; v1@-1048.63,-260.63 v1(-1048,-260)
  Top Layer w20: v1(-1429,-263) -1429,155.51 -1505,231.51 -1505,645 -1349,801 -1036,801 -892,945 -892,1135 -600,1427 -189,1427 -41,1575 488,1575 531,1532 656,1532 746.8,1441.2 825.24,1441.2 v1(841.61,1424.84) ; C8.1@-1048.63,-309.8 v1@-1048.63,-260.63
  Bottom Layer w14: v1(-1429,-263) v1@-1427.5,-261.5 ; v1@-1049.5,-261.5 v1(-1048,-260) ; v1(841.61,1424.84) 890,1376.45 CN4.3@890,1290
  Bottom Layer w20: v1@-1427.5,-261.5 v1@-1049.5,-261.5
VDD11_1&2: C17.1 C18.1 L1.1 U2.49 U2.98 | length 1936.8
  Top Layer w7: C17.1@-494,-211 -490.71,-207.71 -465.71,-207.71 -432.07,-174.07 -385.87,-174.07 U2.98@-385.65,-173.85 v1(-241.21,-173.85) ; v1(-232.97,239.54) U2.49@223.65,239.54 224.16,240.05 264.77,240.05 273.07,248.35 273.07,388.46 324.61,440 348.19,440 ; C18.1@348.19,397 348.19,440 ; L1.1@405.43,179 475.9,179 480,183.1 480,435.9 475.9,440 348.19,440
  Bottom Layer w7: v1(-241.21,-173.85) -241.21,-169.25 -232.97,-161.01 v1(-232.97,239.54)
VREF+: CN3.3 U2.20 | length 1048.9
  Top Layer w7: U2.20@56.8,-281.65 56.8,-200.57 60.9,-196.47 128.47,-196.47 193.5,-261.5 659.63,-261.5 766,-155.13 766,-59.11 761.9,-55.01 684.87,-55.01 CN3.3@679.88,-60
pads on no net: BH1.1 BH1.2 C15.1 CN1.6 CN1.7 CN1.MP1 CN1.MP2 CN2.4 CN2.5 CN3.7 CN4.1 CN4.2 CN4.9 ESD3.5 H1.1 H2.1 H3.1 H4.1 PTH1.1 PTH2.1 SW1.1 SW2.1 SW3.1 SW4.1 U1.17 U1.18 U1.22 U2.1 U2.2 U2.3 U2.4 U2.5 U2.6 U2.12 U2.13 U2.29 U2.32 U2.34 U2.36 U2.37 U2.42 U2.52 U2.53 U2.54 U2.57 U2.58 U2.59 U2.62 U2.63 U2.64 U2.70 U2.71 U2.81 U2.86 U2.87 U2.90

## Polygon pours and split planes (outlines as drawn)
DVDD on Top Layer "DVDD_L01_P002" (solid, pour order 2): -1617.71,453.29 ccw(c0,0) 1680.01,0 ccw(c4.14,-0.08) 1670.9,174.81 ccw(c1660.93,173.77) 1650.97,172.73 cw(c0.6,0.05) 1659.95,10.06 cw(c-3.56,10.8) -1603.02,467.98 ccw(c-1603.16,453.43)
GND on Bottom Layer "GND_L02_P001" (solid, pour order 1): 0,-1650 cw(c0,0) -1650,0 cw(c0,0) 0,1650 cw(c0,0) 1650,0 cw(c0,0)

## Silkscreen, mask and mechanical layers (free items; w line width, h text height)
Top Overlay:
  drawing of 10 lines, arcs and shapes, not listed
  text "LOTE 2601161" at -628,1484.72 h65
  text "FM-320U-B1 V1R1R1" at -621,1406.72 h65
  text "ON" at -1193,587.67 h60
  text "OFF" at -1438,586.67 h60
  text "PD1" at -1570,500 h60
  text "PD2" at -1570,448 h60
  text "PD3" at -1570,397.67 h60
  text "PD4" at -1570,348 h60
  text "9" at 740,72.61 h55
  text "20" at -1383.05,59.61 h55
  text "7" at 740,23 h55
  text "18" at -1380,9.61 h55
  text "5" at 740,-29.39 h55
  text "16" at -1380,-41.39 h55
  text "FLOW" at -1069,-42.39 h55
  text "3" at 740,-78.39 h55
  text "14" at -1380,-89 h55
  text "12" at -1380,-141 h55
  text "10" at -1380,-188.39 h55
  text "8" at -1380,-236.39 h55
  text "6" at -1380,-288.39 h55
  text "4" at -1380,-343 h55
  text "GND" at -1429,-397.39 h55
  text "-" at 194,-1090.99 h60
  text "+" at -191,-1092 h60
Bottom Overlay:
  text "CR1220" at -712,1158.67 h60
  text "Signal" at -641,-931.98 h80
  text "Run" at -646,-1017.19 h80
  text "Error" at -646,-1100.19 h80
  text "➜" at 920.7,-1140.58 h150 r270
  text "Esc" at -932.14,-1267.75 h150
  text "➜" at 299.3,-1302.42 h150 r90
  text "⤶" at -206.28,-1312 h300
Mechanical 13:
  circle w10: c0,0 r1692.91

## Text inside footprints (layer, text, board x,y; h text height)
LD1: Bottom Overlay "K" at -397.01,-1119.61 h114.17
LD2: Bottom Overlay "K" at -397.01,-1034.61 h114.17
LD3: Bottom Overlay "K" at -392.01,-944.61 h114.17